# Altium PCB batterieCB_v1 (2) - Copy.PcbDoc
Units mm, origin at the board's own origin, x right, y up, seen from the top; angles counter-clockwise.
Board outline 92.46 x 92.46 mm, 2 copper layers (Top Layer, Bottom Layer), stack 0.471 mm thick; 21 components, 16 nets, 75 pads, 21 vias.
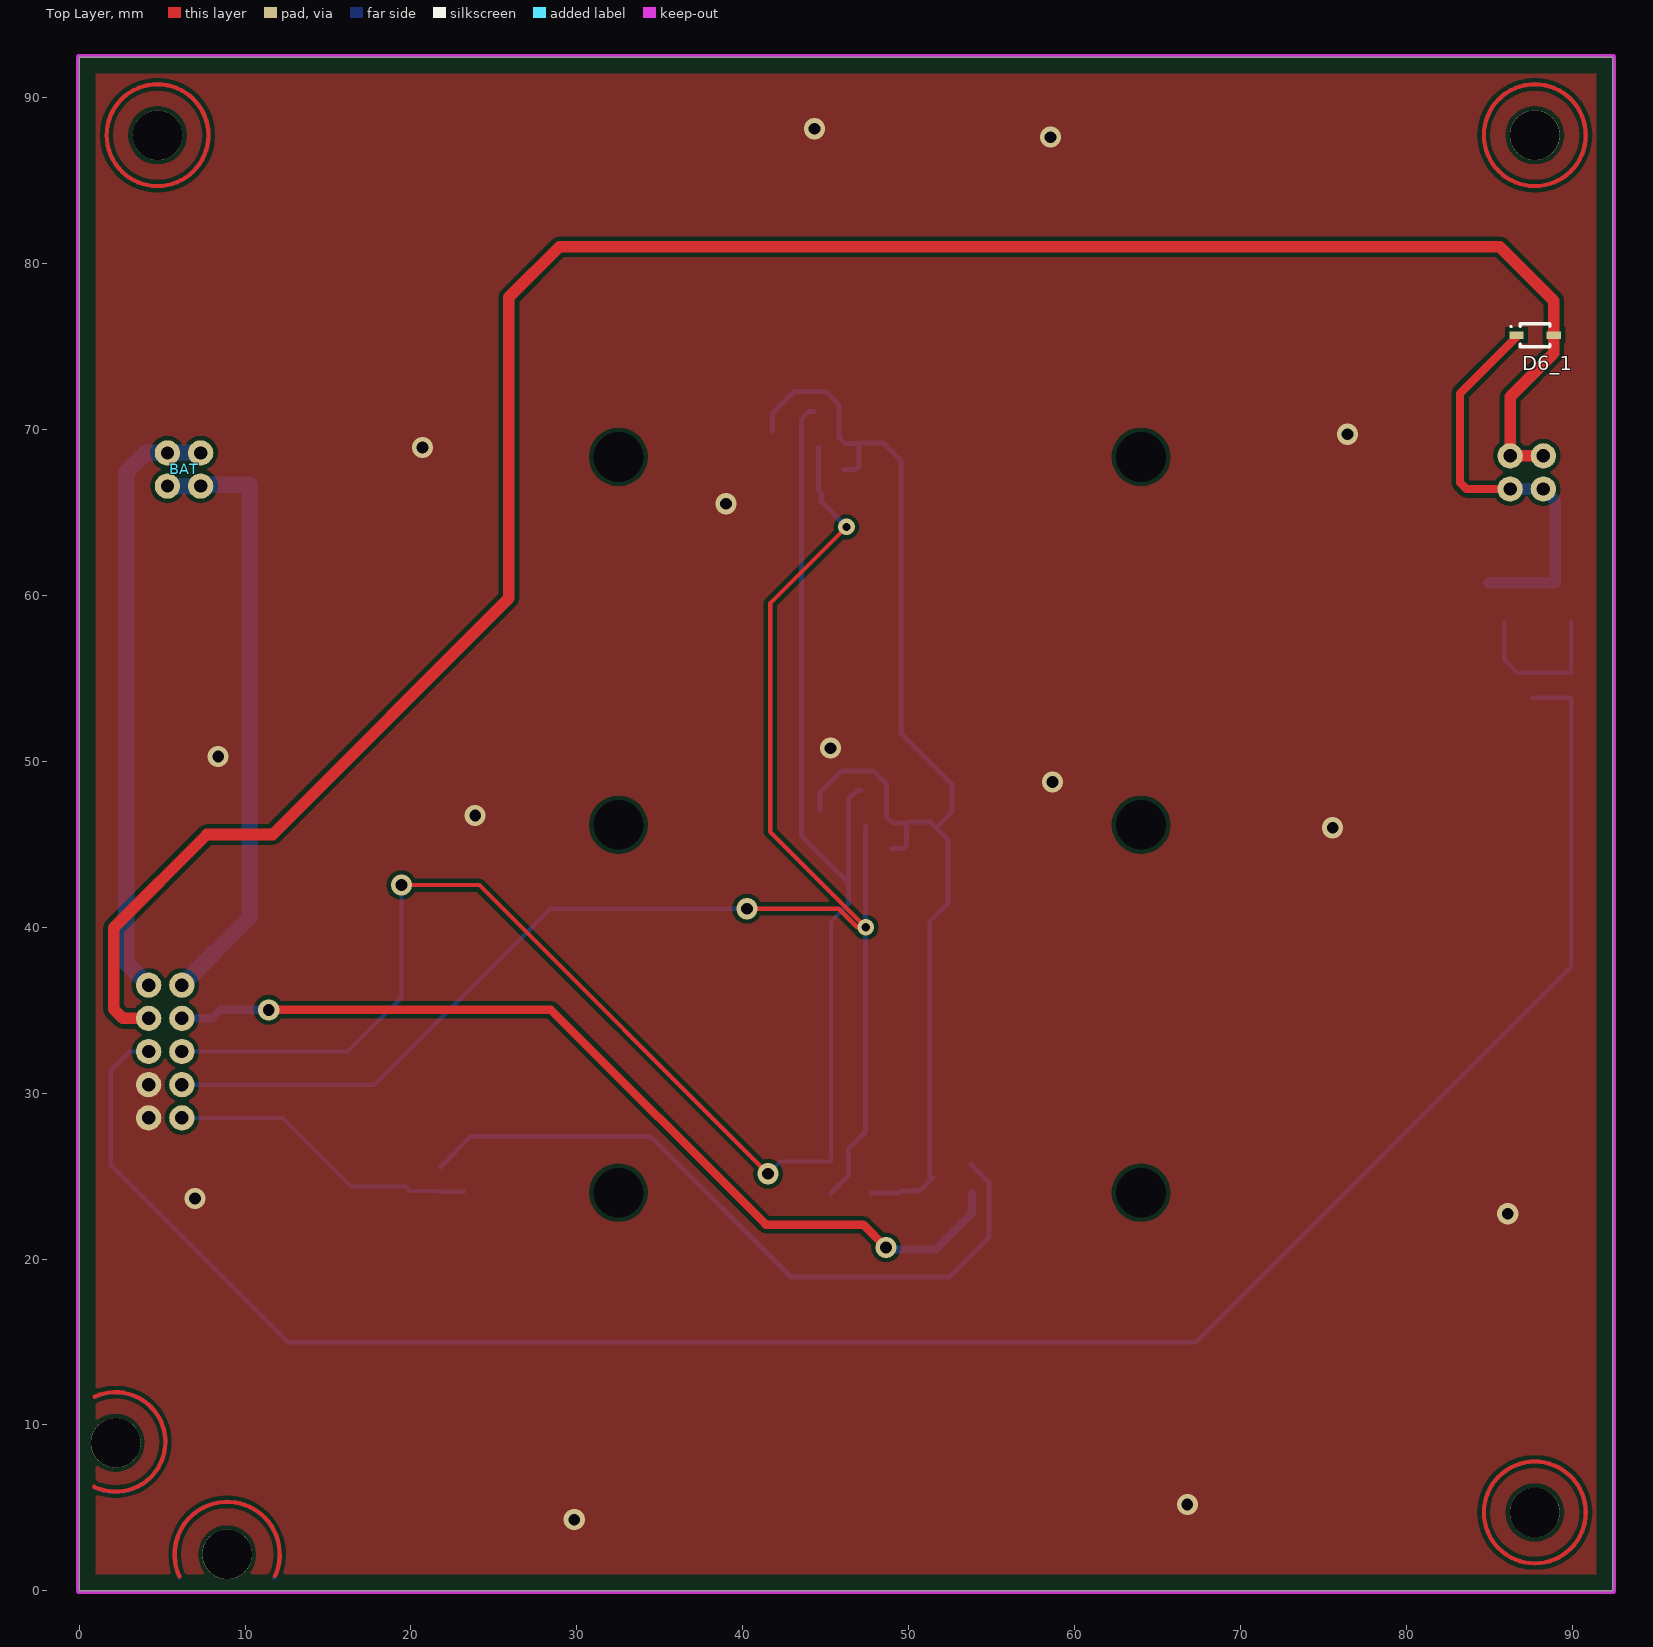
[diagram p0: Top Layer view]
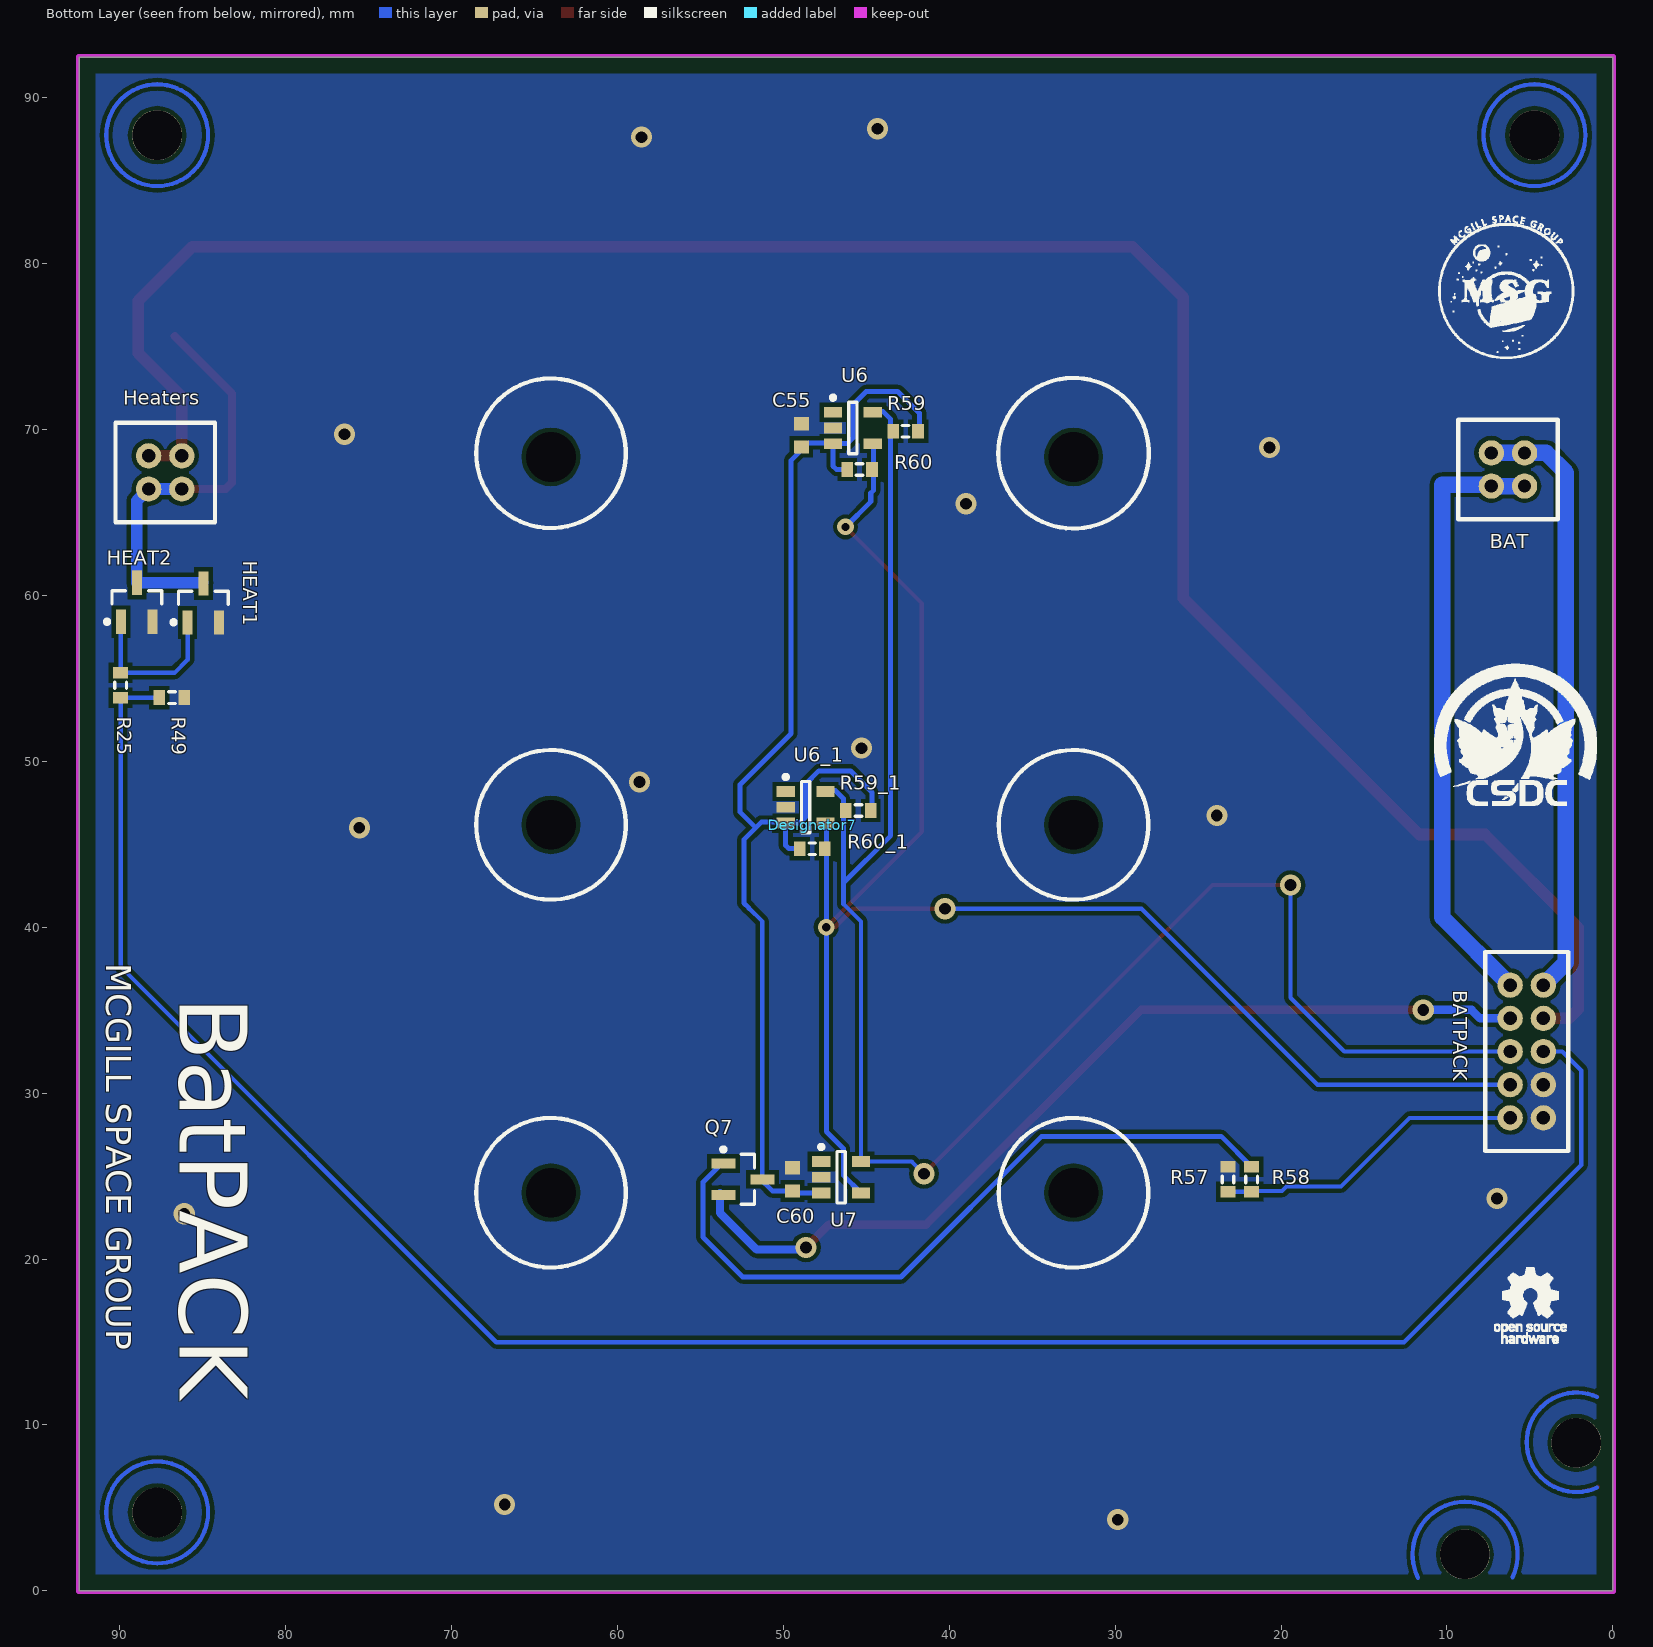
[diagram p1: Bottom Layer view, seen from below]

## Layer stack, top to bottom
Top Solder: solder mask 0.0102, Solder Resist, Dk 3.5
Top Layer: signal copper 0.0356
Dielectric 1: dielectric 0.4, FR-4, Dk 4.8
Bottom Layer: signal copper 0.0356
Bottom Solder: solder mask 0.0102, Solder Resist, Dk 3.5

## Board outline
0,0 92.456,0 92.456,92.456 0,92.456

## Design rules (kind name [scope] priority, off if disabled: settings)
BoardOutlineClearance [All] p1: gap=1 ignorepadtopadclearanceinfootprint=FALSE
Clearance [All] p1: gap=0.254 ignorepadtopadclearanceinfootprint=FALSE except(0: Arc-Hole Track-Hole SMDPad-Hole THPad-Hole Via-Hole Fill-Hole Poly-Hole Region-Hole Text-Hole)
PlaneConnect [All] p1: planeconnectstyle=Direct reliefexpansion=0.508 reliefentries=4 reliefconductorwidth=0.254 reliefairgap=0.254
PolygonConnect [All] p1: connectstyle=Direct reliefconductorwidth=0.254 reliefentries=4 polygonreliefangle="90 Angle" airgapwidth=0.254
RoutingVias [All] p1: holewidth=0.711 width=1.27 viastyle="Through Hole" minholewidth=0.711 minwidth=1.27 maxholewidth=0.711 maxwidth=1.27
SolderMaskExpansion [All] p1: expansion=0.07
Width [All] p1: maxlimit=4 minlimit=0.1 preferedwidth=0.254 minimp=50.000000 maximp=50.000000 favimp=50.000000
29 further rules are at their usual default settings.

## Components (designator, comment, footprint, x,y, rotation, side; value= is the part's Value field where it differs from the comment)
BAT "Header 4" 2mm4way2row#1 7.323,66.599 r90 top (schematic designator UMB)
BATPACK "MOLEX  87831-1020" "2mm pitch con" 4.191,36.512 r270 bottom (schematic designator Right)
C55 "Cap" 1608[0603] 48.903,69.658 r90 bottom
C60 "Cap" 1608[0603] 49.447,24.811 r90 bottom
D6_1 "PMEG2005AEA" "SOD323 - duplicate" 87.769,75.692 r0 bottom (schematic designator D6)
Designator7 "Comment" 18650_pack 64.012,24 r90 bottom locked
HEAT1 "FDV305N" SOT-23_M 84.963,59.563 r90 bottom
HEAT2 "FDV305N" SOT-23_M 88.976,59.595 r90 bottom
Heaters "Header 4" 2mm4way2row#2 86.265,66.421 r0 bottom
Q7 "MOSFET-P" SOT-23_M 52.447,24.811 r180 bottom
R25 "Res1" J1-0603 89.953,54.591 r270 bottom
R49 "Res1" J1-0603 86.869,53.841 r0 bottom
R57 "Res1" J1-0603 23.2,24.807 r270 bottom
R58 "Res1" J1-0603 21.775,24.807 r270 bottom
R59 "Res1" J1-0603 42.635,69.904 r0 bottom
R59_1 "Res1" J1-0603 45.486,47.037 r0 bottom (schematic designator R59)
R60 "Res1" J1-0603 45.41,67.604 r180 bottom
R60_1 "Res1" J1-0603 48.261,44.737 r180 bottom (schematic designator R60)
U6 "TC74A0-5.0VCTTR" SOT-23-CT5_N 45.81,70.104 r180 bottom
U6_1 "TC74A0-5.0VCTTR" SOT-23-CT5_N 48.661,47.237 r180 bottom (schematic designator U6)
U7 "TC74A0-5.0VCTTR" SOT-23-CT5_N 46.522,24.936 r180 bottom

## Footprints (in the part's own frame and the unit in brackets; to place one, negate y for a bottom-side part, rotate by r counter-clockwise, add the part's x,y. Pads: shape width x height; smd on the part's side, far side on the other; paste and mask are expansions set on the pad)
2mm4way2row#1 [mm]
  round 1.524 hole 0.8: 1(0,0) 2(2,0) 3(0,2) 4(2,2)
  body extent -2.32,-2.15 4.33,4.15, height 6.4
2mm4way2row#2 [mm]
  round 1.524 hole 0.8: 1(0,0) 2(2,0) 3(0,-2) 4(2,-2)
  silkscreen extent -2,-4 4,2, body extent -2.32,-4.15 4.33,2.15, height 6.4
"2mm pitch con" [mil]
  round 60 hole 31.5: 1(0,0) 2(0,-78.74) 3(78.74,0) 4(78.74,-78.74) 5(157.48,0) 6(157.48,-78.74) 7(236.22,0) 8(236.22,-78.74) 9(314.96,0) 10(314.96,-78.74)
  silkscreen extent -79,-138 394,59, body extent -79,-138 394,59, height 260
1608[0603] [mm] "Chip Capacitor, Body 1.6x0.8mm, IPC High Density"
  rect 0.8x0.9 smd: 1(-0.7,0) 2(0.7,0)
  body extent -0.87,-0.48 0.87,0.48, height 1.3
18650_pack [mil]
  round 60 hole 118.11: 1(0,0) 1(873.19,-1240.16) 1(873.19,0) 2(1746.38,0) 3(1746.38,-1240.16) 4(0,-1240.16)
  silkscreen extent -178,-1419 1934,178, body extent -921,-1903 2676,664, height 835
J1-0603 [mm] "Chip Resistor, Body 1.6x0.8mm, IPC High Density"
  rect 0.7x0.9 smd: 1(-0.75,0) 2(0.75,0)
  silkscreen extent -0.2,-0.35 0.2,0.35, body extent -0.85,-0.48 0.85,0.48, height 0.9
"SOD323 - duplicate" [mm]
  rect 0.85x0.45 smd far side: 1(-1.125,0) 2(1.125,0)
  body extent -0.9,-0.67 0.9,0.67, height 1.1
SOT-23-CT5_N [mm] "SOT23, 5-Leads, Body 2.9x1.6mm, Pitch 0.95mm, Lead Span 2.7mm, IPC Medium Density"
  rect 1.1x0.65 smd: 1(-1.2,0.95) 2(-1.2,0) 3(-1.2,-0.95) 4(1.2,-0.95) 5(1.2,0.95)
  silkscreen extent -1.33,-1.55 0.25,1.95, body extent -0.9,-1.55 0.9,1.55, height 1.45
SOT-23_M [mm] "SOT23, 3-Leads, Body 2.9x1.3mm, Pitch 0.95mm, Lead Span 2.5mm, IPC Low Density"
  rect 1.45x0.6 smd: 1(-1.175,0.95) 2(-1.175,-0.95) 3(1.175,0)
  silkscreen extent -1.3,-1.5 0.7,1.93, body extent -0.7,-1.5 0.7,1.5, height 1.1

## Part data
BAT Heaters: "Header, 4-Pin"
BATPACK: library part "Header 10", "Header, 10-Pin"
C55 C60: "Capacitor"
D6_1: library part Diode, "Default Diode"
HEAT1 HEAT2: library part MOSFET-N, "N-Channel MOSFET"
Q7: "P-Channel MOSFET"
R25 R49 R57 R58 R59 R59_1 R60 R60_1: "Resistor"
U6 U6_1 U7: "Tiny Serial Digital Thermal Sensor, 5-Pin SOT-23, Extended Temperature, Tape and Reel"

## Free pads (board coordinates)
  round 3 hole 3: 1(2.2,8.925) 1(8.925,2.2) 2(4.725,87.75) 3(87.75,87.75) 4(87.75,4.725)

## Via types
v1: diameter 1.27, hole 0.711, Top Layer to Bottom Layer, 19 vias
v2: diameter 1, hole 0.5, Top Layer to Bottom Layer, 2 vias

## Nets (pads, with @x,y where several pads share a name; then routed paths per layer and width w, separated by ;. In a path a pad name is that pad's centre, name@x,y a point inside that pad or via, vN(x,y) a via of type N, cw(c..) or ccw(c..) an arc to the next point about the centre after c; other vN are vias at no path point)
3_3V: BATPACK.4 Q7.2 | length 55.9
  Top Layer w0.5: v1(11.43,35.024) 28.445,35.024 41.395,22.074 47.268,22.074 v1(48.641,20.701)
  Bottom Layer w0.5: BATPACK.4 8.001,34.512 8.513,35.024 v1(11.43,35.024) ; v1@48.641,20.574 51.61,20.574 53.822,22.786 Q7.2@53.822,23.961
BAT+: BAT.1 BAT.3 BATPACK.2 | length 36.9
  Bottom Layer w1: BAT.3 BAT.1 7.399,66.675 10.287,66.675 10.287,40.608 BATPACK.2
BAT-: BAT.2 BAT.4 BATPACK.1 | length 36.5
  Bottom Layer w1: BATPACK.1 2.828,37.875 2.828,67.41 4.017,68.599 BAT.4 BAT.2
C55-1: C55.1 C60.1 Q7.3 R59.1 R59_1.1 R60.1 R60_1.1 U6.3 U6_1.3 U7.3 | length 77.6
  Bottom Layer w0.254: Q7.3 51.272,40.35 52.07,41.148
  Bottom Layer w0.3: R59.1@41.81,69.904 41.81,71.004 43.11,72.304 45.01,72.304 45.81,71.504 45.81,69.504 46.16,69.154 U6.3 47.01,67.804 46.81,67.604 R60.1 R60.1@46.11,67.604 ; R59_1.1@44.661,47.037 44.661,48.137 45.961,49.437 47.861,49.437 48.661,48.637 48.661,46.637 49.011,46.287 U6_1.3 49.861,44.937 49.661,44.737 R60_1.1 R60_1.1@48.961,44.737 ; U6.3@47.235,69.204 48.485,69.204 49.535,68.154 49.535,51.684 52.608,48.611 52.608,46.94 51.671,46.002 ; U7.3 49.422,23.986 49.547,24.111 50.672,24.111 Q7.3@51.472,24.911 ; U6_1.3@50.086,46.337 51.336,46.337 51.671,46.002 ; 52.07,41.148 52.386,41.464 52.386,45.287 51.671,46.002
GND: BATPACK.7 BATPACK.9 C55.2 C60.2 HEAT1.2 HEAT2.2 R49.1 R57.1 U6.2 U6_1.2 U7.2
  other v1: 29.845,4.292 66.802,5.207 86.122,22.733 6.985,23.644 75.565,46.002 23.876,46.736 58.674,48.766 8.382,50.292 45.301,50.8 38.989,65.532 20.701,68.929 76.454,69.723 58.547,87.63 44.322,88.138
HEATERS: BATPACK.5 R25.2 R49.2 | length 128.9
  Bottom Layer w0.254: BATPACK.5 3.048,32.512 1.905,31.369 1.905,25.675 12.594,14.986 67.312,14.986 89.953,37.627 R25.2 R49.2
I2CRESET: BATPACK.10 R57.2 R58.2 | length 18.9
  Bottom Layer w0.254: BATPACK.10 12.255,28.512 16.383,24.384 19.666,24.384 19.939,24.111 21.721,24.111 R58.2 R57.2
NetC55_1: 
NetD6_1: D6_1.1 HEAT1.3 HEAT2.3 Heaters.1 Heaters.2 | length 25.4
  Top Layer w0.5: Heaters.1 83.624,66.421 83.243,66.802 83.243,72.178 D6_1.1@86.7,75.636
  Bottom Layer w0.254: HEAT1.3 HEAT1.3@84.995,60.77
  Bottom Layer w0.7: HEAT1.3@84.995,60.77 HEAT2.3 88.976,65.71 Heaters.2 Heaters.1
NetHEAT1_1: HEAT1.1 HEAT2.1 R25.1 | length 9.7
  Bottom Layer w0.254: HEAT1.1 85.913,56.128 86.7,55.341 R25.1 89.953,58.393 HEAT2.1
NetQ7_1: Q7.1 R58.1 | length 43.2
  Bottom Layer w0.305: R58.1 23.615,27.397 34.433,27.397 42.907,18.923 52.451,18.923 54.847,21.319 54.847,24.636 Q7.1@53.722,25.761
PC3: 
SCL: BATPACK.8 R60.2 R60_1.2 U6.4 U6_1.4 U7.4 | length 102.9
  Top Layer w0.254: v1(40.259,41.119) 45.789,41.119 46.903,40.005 v2(47.411,40.005) 41.656,45.76 41.656,59.531 v2(46.26,64.135)
  Bottom Layer w0.254: BATPACK.8 17.812,30.512 28.419,41.119 v1(40.259,41.119)
  Bottom Layer w0.305: U6.4@44.56,68.929 44.56,66.344 44.736,66.168 44.736,65.659 v2(46.26,64.135) ; U7.4 46.386,25.05 46.386,26.665 47.411,27.69 v2(47.411,40.005) U6_1.4@47.411,46.062
SDA: BATPACK.6 R59.2 R59_1.2 U6.5 U6_1.5 U7.5 | length 108.1
  Top Layer w0.254: v1(19.431,42.545) 24.13,42.545 v1(41.529,25.146)
  Bottom Layer w0.254: BATPACK.6 16.189,32.512 19.431,35.754 v1(19.431,42.545) ; v1(41.529,25.146) 42.269,25.886 U7.5 45.322,40.346 46.386,41.41
  Bottom Layer w0.3: U6.5@44.285,71.104 44.01,71.104 43.535,70.629 43.535,45.523 46.386,42.672 ; 46.386,41.41 46.386,42.672 ; U6_1.5@47.136,48.237 46.861,48.237 46.386,47.762 46.386,42.672
U6-2: 
VCC: BATPACK.3 D6_1.2 Heaters.3 Heaters.4 | length 135.5
  Top Layer w0.7: BATPACK.3 2.623,34.512 2.083,35.052 2.083,39.972 7.704,45.593 11.662,45.593 25.908,59.839 25.908,77.978 28.956,81.026 85.644,81.026 88.894,77.776 D6_1.2 88.894,74.605 86.265,71.976 Heaters.3 Heaters.4
pads on no net: Designator7.1 Designator7.2 Designator7.3 Designator7.4 U6.1 U6_1.1 U7.1
copper on no net: | length 165.3
  Top Layer w0.254: 0.906,6.273 ccw(c2.198,8.98) 0.939,11.703 ; 6.051,0.868 cw(c8.925,2.2) 11.809,0.89 ; 7.793,87.75 ccw(c4.725,87.75) 7.793,87.75 ; 90.818,4.725 ccw(c87.75,4.725) 90.818,4.725 ; 90.818,87.75 ccw(c87.75,87.75) 90.818,87.75
  Bottom Layer w0.254: 0.947,11.683 cw(c2.194,8.955) 0.948,6.226 ; 6.057,0.817 cw(c8.906,2.2) 11.74,0.785 ; 7.793,87.75 ccw(c4.725,87.75) 7.793,87.75 ; 90.818,4.725 ccw(c87.75,4.725) 90.818,4.725 ; 90.818,87.75 ccw(c87.75,87.75) 90.818,87.75

## Polygon pours and split planes (outlines as drawn)
GND on Top Layer "Top Layer-GND" (solid, pour order 0): 0,0 92.456,0 92.456,92.456 0,92.456
GND on Bottom Layer "Top Layer-GND" (solid, pour order 1): 0,0 92.456,0 92.456,92.456 0,92.456

## Keep-outs
Keep-Out Layer:
  lines w0.2: -0.1,0 ccw(c0,0) 0,-0.1 ; -0.1,0 ccw(c0,0) 0,-0.1 ; -0.1,0 -0.1,92.456 ; -0.1,92.456 cw(c0,92.456) 0,92.556 ; -0.1,92.456 cw(c0,92.456) 0,92.556 ; 0,-0.1 92.456,-0.1 ; 0,92.556 92.456,92.556 ; 92.456,-0.1 ccw(c92.456,0) 92.556,0 ; 92.456,-0.1 ccw(c92.456,0) 92.556,0 ; 92.456,92.556 cw(c92.456,92.456) 92.556,92.456 ; 92.456,92.556 cw(c92.456,92.456) 92.556,92.456 ; 92.556,0 92.556,92.456

## Silkscreen, mask and mechanical layers (free items; w line width, h text height)
Bottom Overlay:
  drawing of 4079 lines, arcs and shapes, not listed
  text "MCGILL SPACE GROUP" at 90.83,37.846 h1.52 r90
  text "BatPACK" at 87.75,35.814 h7 r90
Drill Drawing:
  lines w0.254: -0.381,89.662 -0.381,92.456